# EAGLE board i2c_master_v2 (EAGLE 6.2)
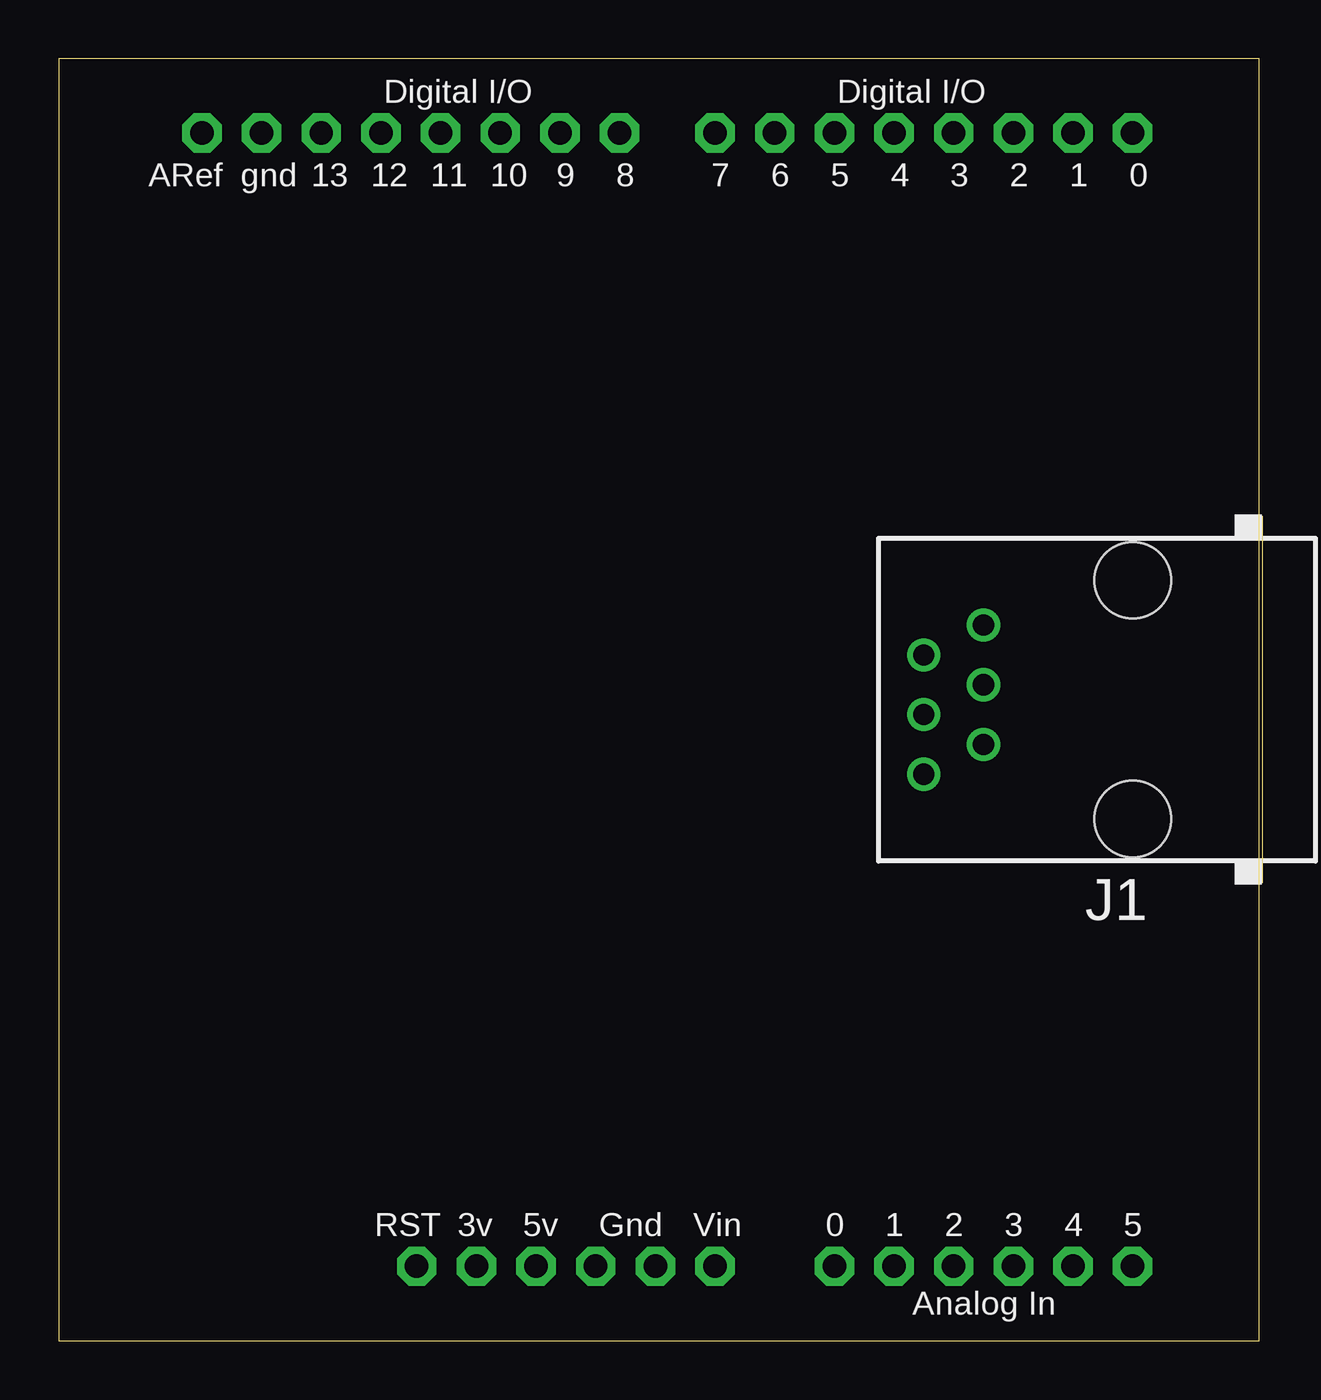
[diagram p0: board, top side]
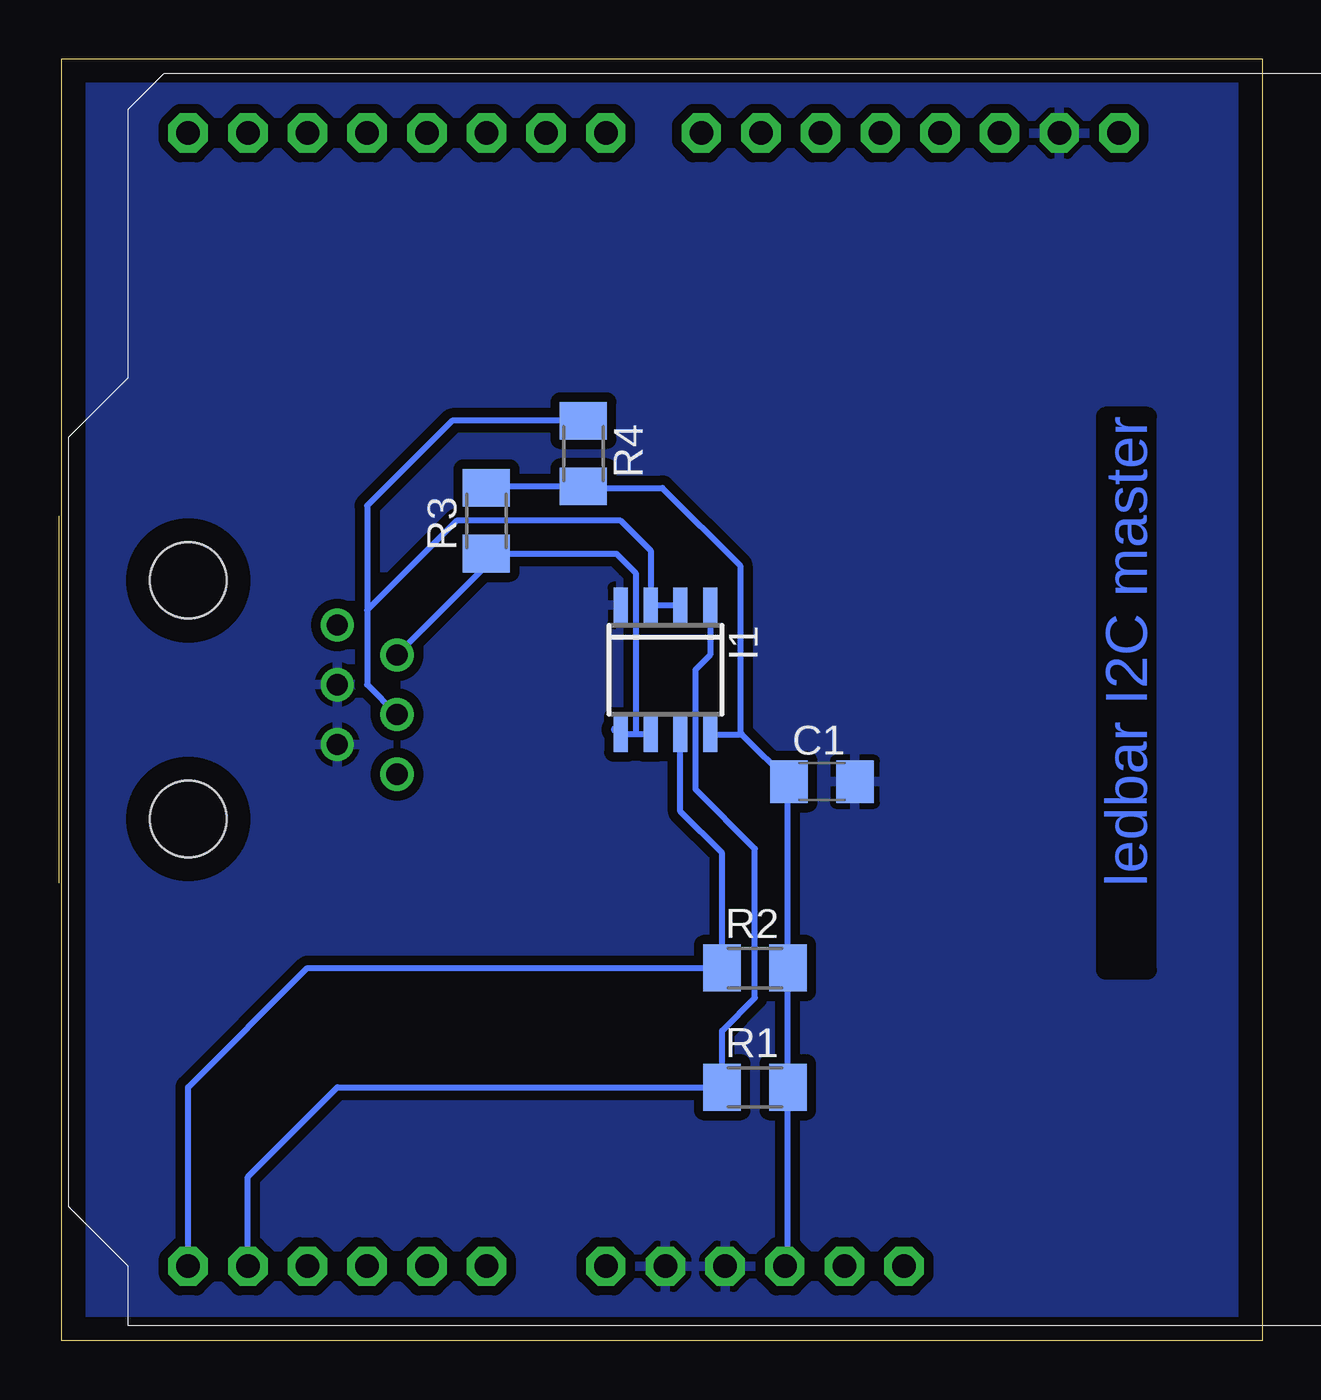
[diagram p1: board, bottom side, seen from below]

Size 51.11 x 54.6 mm. Coordinates in mm from the lower left corner, seen from the top.
Outline: 0,0 51.11,0 51.11,54.6 0,54.6 0,0
Copper layers (1*16): Top 0.035mm / dielectric 1.5mm / Bottom 0.035mm
Design rules: minimum track width 10mil, minimum drill 24mil, track to track 16mil, track to pad 16mil, pad to pad 16mil, via to via 16mil, smd to smd 8mil, copper to edge 40mil, drill to drill 8mil, minimum pad ring 10mil, minimum via ring 8mil, stop-mask expansion 4mil, vias tented up to drill 0mil, thermal gap 10mil

## Footprints (pad centres in the part's own frame; a part is rotated, then mirrored left to right if it is on the bottom)
C1206 = smd 1.6 x 1.8: 1 -1.4,0; 2 1.4,0
SOIC8 = smd 0.6 x 1.5: 1 -1.905,-2.75; 2 -0.635,-2.75; 3 0.635,-2.75; 4 1.905,-2.75; 5 1.905,2.75; 6 0.635,2.75; 7 -0.635,2.75; 8 -1.905,2.75
RJ11-NO_SHIELD = drill 0.9 pad 1.4: 1 -3.175,8.89; 2 -1.905,6.35; 3 -0.635,8.89; 4 0.635,6.35; 5 1.905,8.89; 6 3.175,6.35 | hole 3.251: -5.08,0; 5.08,0
M1206 = smd 1.6 x 2: 1 -1.4,0; 2 1.4,0
ARDUINO-NOHOLE = drill 1 pad 1.676 octagon: 3V 35.56,2.54; 5V 38.1,2.54; A0 50.8,2.54; A1 53.34,2.54; A2 55.88,2.54; A3 58.42,2.54; A4 60.96,2.54; A5 63.5,2.54; AREF 23.876,50.8; D0 63.5,50.8; D1 60.96,50.8; D2 58.42,50.8; D3 55.88,50.8; D4 53.34,50.8; D5 50.8,50.8; D6 48.26,50.8; D7 45.72,50.8; D8 41.656,50.8; D9 39.116,50.8; D10 36.576,50.8; D11 34.036,50.8; D12 31.496,50.8; D13 28.956,50.8; GND 26.416,50.8; GND1 43.18,2.54; GND2 40.64,2.54; RESET 33.02,2.54; VIN 45.72,2.54

## Placement (x,y rotation side)
C1  100n  [C1206]  18.73,23.81 0 bottom
I1  P82B96  [SOIC8]  25.4,28.57 180 bottom
J1  RJ11-4X  [RJ11-NO_SHIELD]  45.72,27.3 90 top
R1  10k  [M1206]  21.59,10.79 0 bottom
R2  10k  [M1206]  21.59,15.88 0 bottom
R3  10k  [M1206]  33.02,34.92 90 bottom
R4  10k  [M1206]  28.89,37.78 270 bottom
U$1  ARDUINO-NOHOLE  [ARDUINO-NOHOLE]  -17.78,0.64 0 top

## Library data of the parts
C1 R1-R4 = resistor
I1 = P82B96
J1 = con-tycoelectronics; MPN: 6609214-3; OC_FARNELL: unknown; OC_NEWARK: 19R7022
U$1 = adafruit

## Nets
3V: U$1.3V
+5V: C1.1 I1.8 R1.2 R2.2 R3.2 R4.2 U$1.5V
GND: C1.2 I1.4 J1.2 J1.4 U$1.GND U$1.GND1 U$1.GND2
N$1: I1.7 R2.1 U$1.A5
N$2: I1.1 R1.1 U$1.A4
N$3: I1.5 I1.6 J1.5 R3.1
N$4: I1.2 I1.3 J1.3 R4.1
VIN: U$1.VIN

## Tracks (layer width: path | path; a pad name or v marks a point on that pad's centre or on a via)
+5V
  Bottom 0.254: 20.19,3.17 R1.2 R2.2 20.19,23.75 C1.1 22.15,25.82 | R3.2 32.96,36.38 R4.2 28.84,36.32 25.53,36.32 22.23,33.02 22.23,25.9 22.15,25.82 | I1.8 22.15,25.82
  Bottom 0.406: U$1.5V 20.19,3.17
GND
  pour Bottom: -17.78,55.88 55.88,55.88 55.88,-0.95 -17.78,-0.95
N$1
  Bottom 0.254: U$1.A5 45.72,10.79 40.64,15.88 R2.1 22.99,20.77 24.77,22.54 I1.7
N$2
  Bottom 0.254: U$1.A4 43.18,6.99 39.37,10.79 R1.1 22.99,13.21 21.59,14.61 21.59,20.95 24.13,23.49 24.13,28.57 23.5,29.21 I1.1
N$3
  Bottom 0.254: I1.6 26.67,25.82 | 26.67,25.82 I1.5 | 26.67,25.82 26.67,32.7 27.49,33.52 R3.1 33.02,33.02 J1.5
  Bottom 0.406: 27.52,26.04 I1.5
N$4
  Bottom 0.254: I1.3 I1.2 | R4.1 34.48,39.18 38.1,35.56 38.1,31.12 | 38.1,31.12 38.1,27.94 J1.3 | I1.3 26.03,31.75 | I1.3 26.03,33.66 27.31,34.92 34.29,34.92 38.1,31.12

## Text on the board
Bottom: ledbar I2C master